# Altium PCB probe.PcbDoc
Units mil, origin at the board's own origin, x right, y up, seen from the top; angles counter-clockwise.
Board outline 338.58 x 3740.01 mil, 2 copper layers (Top Layer, Bottom Layer); 3 components, 4 nets, 11 pads, 0 vias.
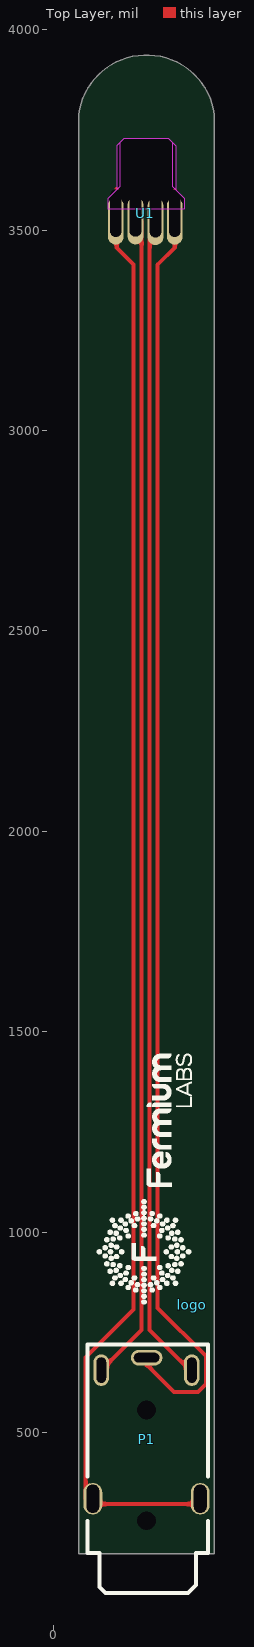
[diagram p0: Top Layer view]
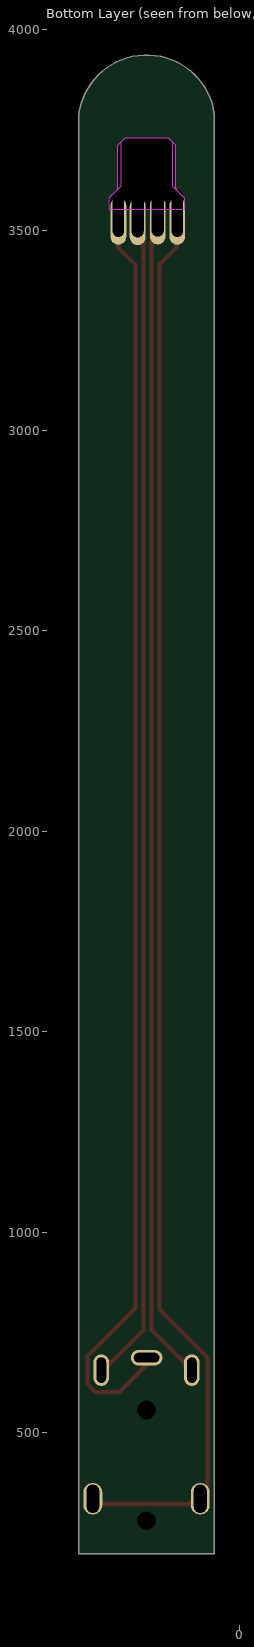
[diagram p1: Bottom Layer view, seen from below]

## Layer stack, top to bottom
Top Solder: solder mask 0.4, Solder Resist, Dk 3.5
Top Layer: signal copper 1.4
Dielectric 1: dielectric 12.6, FR-4, Dk 4.8
Bottom Layer: signal copper 1.4
Bottom Solder: solder mask 0.4, Solder Resist, Dk 3.5

## Board outline
62.99,196.85 62.99,3789.37 cw(c232.28,3766.13) 401.57,3789.37 401.57,196.85
cut-out: 159.66,3712.43 176.71,3729.47 286.71,3729.47 305.33,3710.85 305.33,3600.85 326.71,3579.47 326.71,3552.31 137.02,3552.31 137.02,3579.16 159.66,3602.28

## Design rules (kind name [scope] priority, off if disabled: settings)
Clearance [All] p1: gap=6 ignorepadtopadclearanceinfootprint=FALSE
HoleSize [All] p1: absolutevalues=TRUE maxlimit=100 minlimit=11.81 maxpercent=80.000 minpercent=20.000
PolygonConnect [All] p1: connectstyle=Relief reliefconductorwidth=10 reliefentries=4 polygonreliefangle="90 Angle" airgapwidth=10
RoutingVias [All] p1: holewidth=28 width=50 viastyle="Through Hole" minholewidth=28 minwidth=50 maxholewidth=28 maxwidth=50
SolderMaskExpansion [All] p1: expansion=4
Width [All] p1: maxlimit=200 minlimit=6 preferedwidth=10
29 further rules are at their usual default settings.

## Components (designator, comment, footprint, x,y, rotation, side; value= is the part's Value field where it differs from the comment)
logo "fermiumlabs-logo" frm-med 346.46,818.9 r90 top
P1 "" FC68125 785.43,-660.35 r90 top
U1 "" HE144P-BURIED 155.72,3542.31 r0 top

## Footprints (in the part's own frame and the unit in brackets; to place one, negate y for a bottom-side part, rotate by r counter-clockwise, add the part's x,y. Pads: shape width x height; smd on the part's side, far side on the other; paste and mask are expansions set on the pad)
FC68125 [mm]
  oval 1x2 hole 0.6 slot 1.6 at 90 deg: 1(34.214,14.046)
  oval 2x1 hole 0.6 slot 1.6 at 0 deg: 2(33.426,16.916) 6(33.426,11.176)
  oval 2x1.2 hole 0.8 slot 1.8 at 0 deg: 3(25.273,10.643) 3(25.273,17.45)
  round 0 hole 1.2: ""(23.876,14.046) ""(30.886,14.046)
  silkscreen extent 19.3,10.16 35.05,17.78, body extent 19.37,10.31 34.47,17.71, height 6.2
frm-med [mil]
  silkscreen extent 1,1 626,237
HE144P-BURIED [mm]
  oval 1x3 hole 0.7 slot 3 at 90 deg copper offset 0,-0.5: 1(3.734,0) 4(0,0)
  oval 1x3 hole 0.75 slot 3 at 90 deg copper offset 0,-0.5: 2(2.515,-0.025) 3(1.245,0.025)
  Keep-Out Layer board cut-out: 0.279,4.5 0.533,4.754 3.327,4.754 3.581,4.5 3.581,1.706 4.343,0.944 4.343,0.254 -0.475,0.254 -0.475,0.936 -0.483,0.944 0.279,1.706
  body extent -0.25,-1.02 4.06,4.35, height 0.23

## Part data
P1: library part FC68125, Manufacturer=CLIFF, Category="Jack connectors", ComponentLink1Description=http://static.tme.eu/products_pics/9/3/a/93a060f269bb569398921100f84c519a/360179.jpg, ComponentLink1URL=http://static.tme.eu/products_pics/9/3/a/93a060f269bb569398921100f84c519a/360179.jpg, Connector=socket, Connector type="Jack 3,5mm", Depth=15.1mm, Electrical mounting=THT, Height=6mm, Manufacturer Part Number=FC68125, MinAmount=2, Multiples=1, Number of ways=4, Price Type=NET, Pricing 1="2=0.41, 20=0.37, 100=0.33, 500=0.28 (USD)", Stock 1=1312, SuppliedAmount=0, Supplier 1=TME, Supplier Part Number 1=FC68125, Unit=pcs, Weight=0.942, Width=7.1mm
U1: library part he144p, Manufacturer=Asensor, Manufacturer Part Number=HE144P, Supplier 1="asensor.eu direct"

## Nets (pads, with @x,y where several pads share a name; then routed paths per layer and width w, separated by ;. In a path a pad name is that pad's centre, name@x,y a point inside that pad or via, vN(x,y) a via of type N, cw(c..) or ccw(c..) an arc to the next point about the centre after c; other vN are vias at no path point)
GAUSS-I_N: P1.1 U1.1 | length 3235.9
  Top Layer w10: P1.1@228.18,673.5 300.4,601.28 361.12,601.28 380.18,620.34 380.18,690.69 260.16,810.71 260.16,3413.7 303.15,3456.69 303.15,3598.95
GAUSS-I_P: P1.6 U1.2 | length 2875.7
  Top Layer w10: U1.2@240.16,3476.38 240.16,755.91 341.18,654.88 P1.6@341.18,642.5
GAUSS-VH_N: P1.3 U1.4 | length 3621.5
  Top Layer w10: 157.48,3602.13 157.48,3456.69 200.16,3414.02 200.16,806.46 80.5,686.8 80.5,335.18 94.18,321.5 P1.3@362.18,321.5
GAUSS-VH_P: P1.2 U1.3 | length 2923
  Top Layer w10: P1.2@115.18,642.5 115.18,650.61 220.16,755.59 220.16,3448.08 220.04,3448.2 U1.3@220.04,3521.99
pads on no net: P1.

## Silkscreen, mask and mechanical layers (free items; w line width, h text height)
Mechanical 1:
  lines w10: 331.14,3664.92 366.14,3629.92 366.14,3703.92 331.14,3668.92 ; 331.14,3667.92 551.14,3667.92 ; 547.83,3667.98 574.83,3667.98 733.83,3826.98 733.83,3893.98 ; 62.99,196.85 401.57,196.85 401.57,3789.37 ccw(c232.28,3766.13) 62.99,3789.37 62.99,196.85
  text "Cut out" at 710.83,3961.98 h60